# EAGLE board sensor_frontend_test_v0.5-default.266d5b95 (EAGLE 7.7.0), part 1 of 2
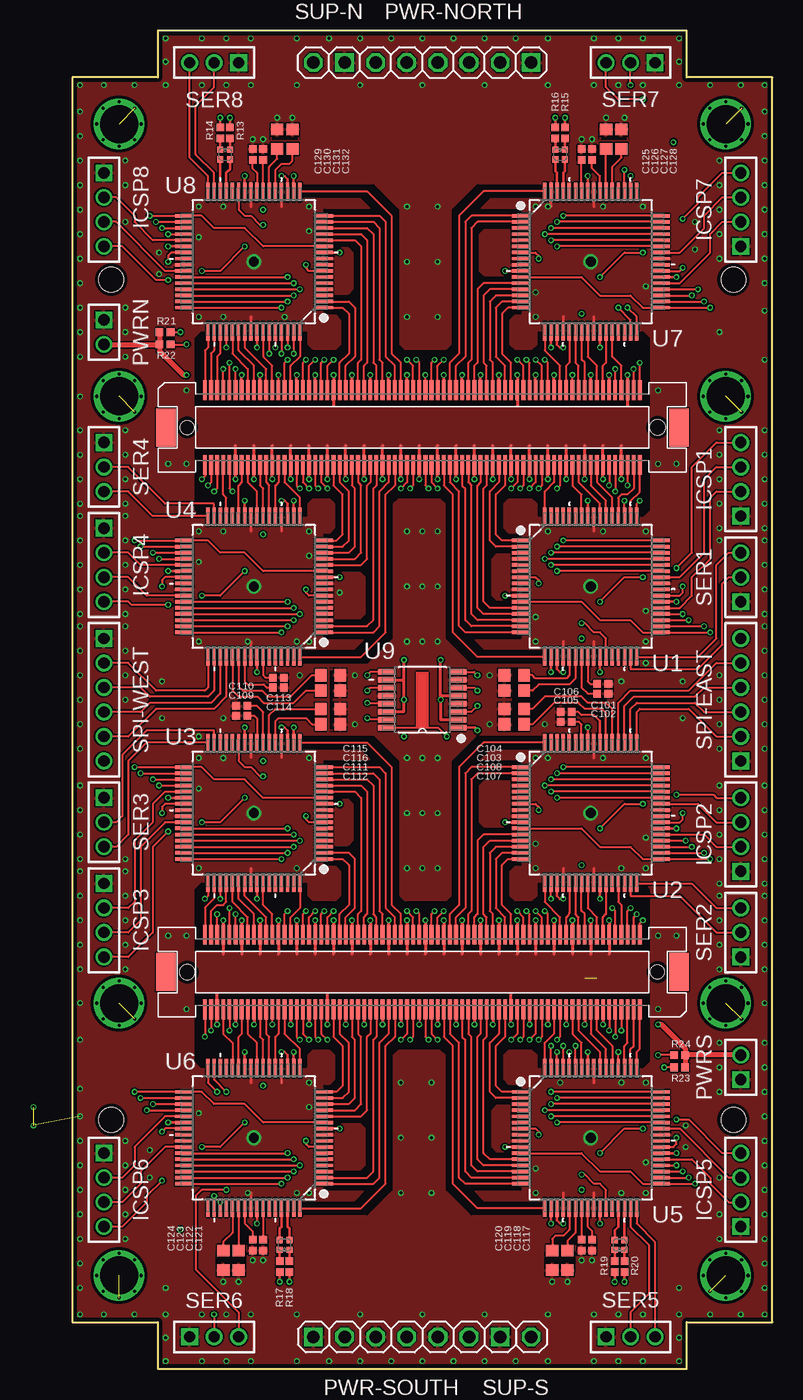
[diagram p0: board, top side]
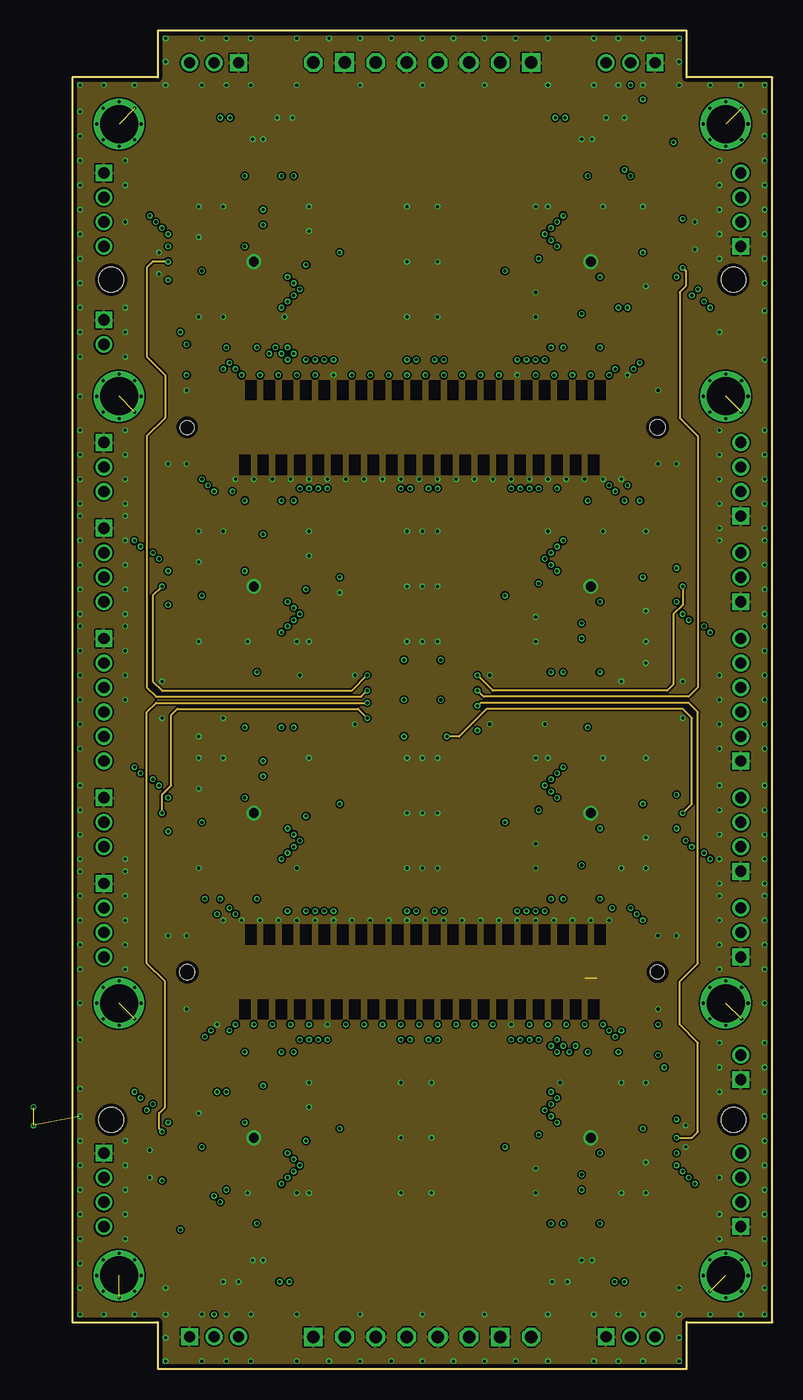
[diagram p1: board, inner layer Route2]
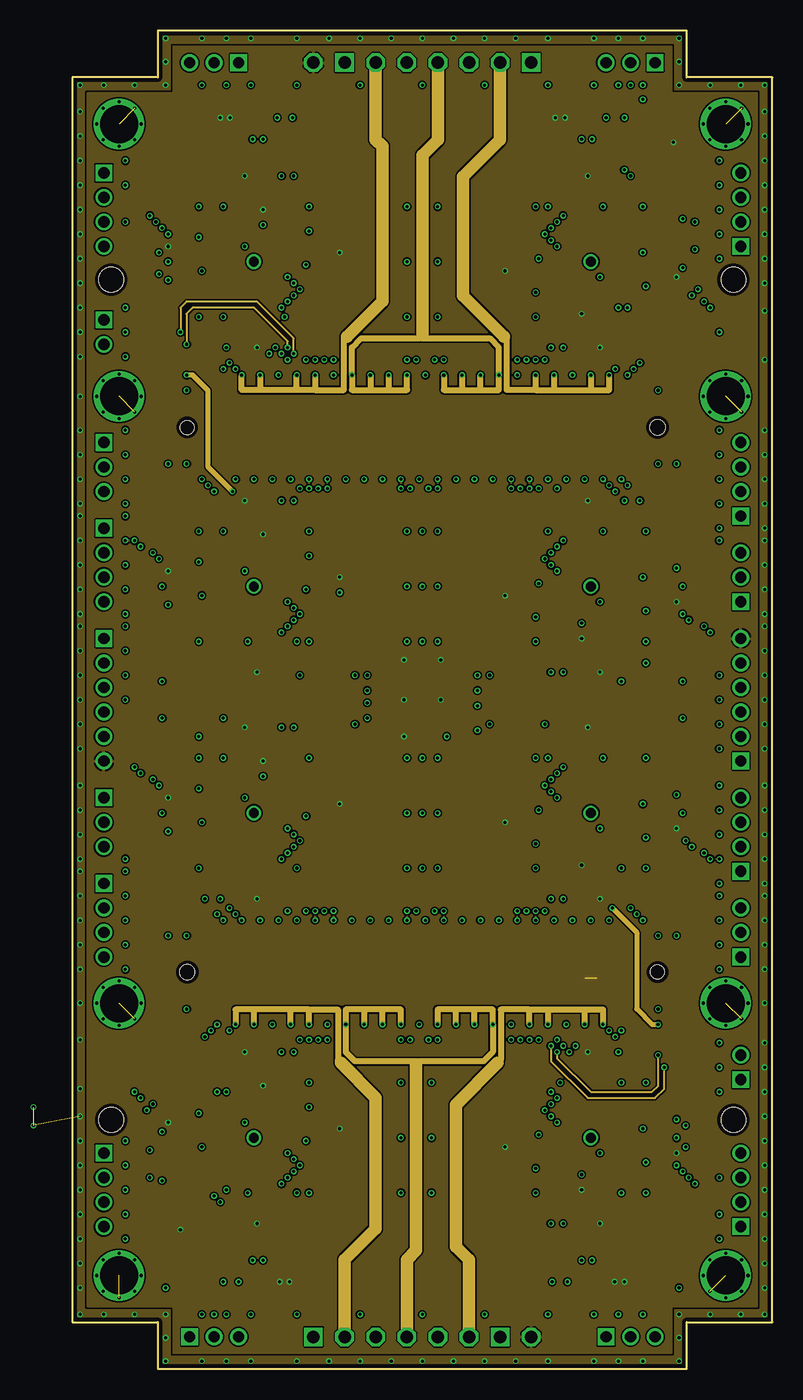
[diagram p2: board, inner layer Route15]
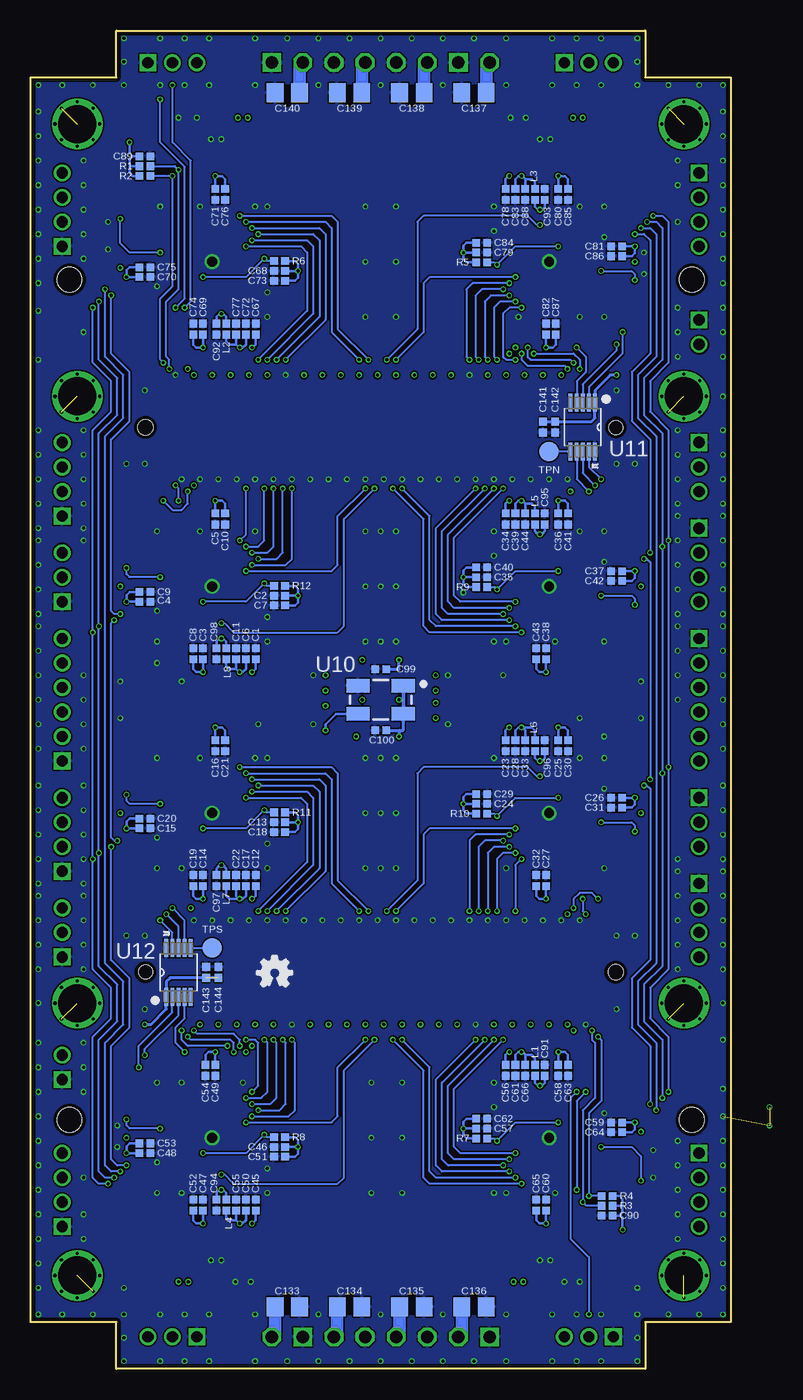
[diagram p3: board, bottom side, seen from below]

Size 57.15 x 109.22 mm. Coordinates in mm from the lower left corner, seen from the top.
Outline: 50.16,109.22 6.98,109.22 6.98,105.41 0,105.41 0,3.81 6.98,3.81 6.98,0 50.16,0 50.16,3.81 57.15,3.81 57.15,105.41 50.16,105.41 50.16,109.22
Copper layers (1*2*15*16): Top 0.035559375mm / dielectric 0.17018125mm / Route2 0.01778125mm / dielectric 47mil / Route15 0.01778125mm / dielectric 0.17018125mm / Bottom 0.035559375mm
Design rules "OSHPark-4layer-tuned *": minimum track width 5mil, minimum drill 10mil, track to track 5mil, track to pad 5mil, pad to pad 5mil, via to via 5mil, smd to smd 5mil, copper to edge 12mil, drill to drill 6mil, minimum pad ring 4mil, minimum via ring 4mil, stop-mask expansion 2mil, vias tented up to drill 40mil, thermal gap 6mil
Net classes: 0 default: width 0.152 mm, drill 0.254 mm; 1 power: width 0.203 mm, drill 0.254 mm; 2 analog: width 0.152 mm, drill 0.254 mm, clearance 0.305 mm
Holes 2 mm at 3.18,88.9 53.97,88.9 3.18,20.32 53.97,20.32
tRestrict: area 1.6,99.4 to 6,103.8; area 21,57.2 to 22,57.2; area 21,56 to 22,56; area 21,53.2 to 22,53.3; area 21,54.7 to 22,54.8; area 21,52.2 to 21.2,57; area 21,54.5 to 22,54.5; area 21,52 to 22,52; area 35.1,52 to 36.6,52; area 35.1,53.2 to 36.1,53.3; area 35.1,56 to 36.1,56; area 35.1,54.5 to 36.1,54.5; 50 more areas
bRestrict: area 19.8,92.3 to 20.8,92.3; area 19.8,91.5 to 20.8,91.5; area 19.8,89.9 to 20.8,89.9; area 8.8,92 to 9.8,92; area 8.8,91.2 to 9.8,91.2; area 8.8,90.4 to 9.8,90.4; area 15.5,84.4 to 15.5,85.4; area 14.7,84.4 to 14.7,85.4; area 13.8,84.4 to 13.9,85.4; area 14.5,95.4 to 14.5,96.4; area 13.7,95.4 to 13.7,96.4; area 12.8,95.4 to 12.9,96.4; 124 more areas

## Footprints (pad centres in the part's own frame; a part is rotated, then mirrored left to right if it is on the bottom)
0402-B = smd 0.62 x 0.62: 1 -0.45,0; 2 0.45,0
0603-B = smd 0.95 x 1: 1 -0.8,0; 2 0.8,0
0805-A = smd 1.35 x 1.55: 1 -1,0; 2 1,0
1X04M = drill 0.914 square: 1 -3,0 | drill 0.914: 2 -1,0; 3 1,0; 4 3,0
0404 = smd 0.5 x 0.5: 1 -0.4,-0.4; 2 0.4,-0.4; 3 0.4,0.4; 4 -0.4,0.4
1X06-S = drill 1.016 square: 1 -6.35,0 | drill 1.016 octagon: 2 -3.81,0; 3 -1.27,0; 4 1.27,0; 5 3.81,0; 6 6.35,0
1X02M = drill 0.914 square: 1 -1,0 | drill 0.914: 2 1,0
1X03M = drill 0.914 square: 1 -2,0 | drill 0.914: 2 0,0; 3 2,0
1X06M = drill 0.914 square: 1 -5,0 | drill 0.914: 2 -3,0; 3 -1,0; 4 1,0; 5 3,0; 6 5,0
1X02-S = drill 1.016 square: 1 -1.27,0 | drill 1.016 octagon: 2 1.27,0
TP16R = smd 1.6 x 1.6: TP 0,0
QFP50P1200X1200X120-64N = smd 1.5 x 0.28: 1 -5.7,3.75; 2 -5.7,3.25; 3 -5.7,2.75; 4 -5.7,2.25; 5 -5.7,1.75; 6 -5.7,1.25; 7 -5.7,0.75; 8 -5.7,0.25; 9 -5.7,-0.25; 10 -5.7,-0.75; 11 -5.7,-1.25; 12 -5.7,-1.75; 13 -5.7,-2.25; 14 -5.7,-2.75; 15 -5.7,-3.25; 16 -5.7,-3.75; 33 5.7,-3.75; 34 5.7,-3.25; 35 5.7,-2.75; 36 5.7,-2.25; 37 5.7,-1.75; 38 5.7,-1.25; 39 5.7,-0.75; 40 5.7,-0.25; 41 5.7,0.25; 42 5.7,0.75; 43 5.7,1.25; 44 5.7,1.75; 45 5.7,2.25; 46 5.7,2.75; 47 5.7,3.25; 48 5.7,3.75 | smd 0.28 x 1.5: 17 -3.75,-5.7; 18 -3.25,-5.7; 19 -2.75,-5.7; 20 -2.25,-5.7; 21 -1.75,-5.7; 22 -1.25,-5.7; 23 -0.75,-5.7; 24 -0.25,-5.7; 25 0.25,-5.7; 26 0.75,-5.7; 27 1.25,-5.7; 28 1.75,-5.7; 29 2.25,-5.7; 30 2.75,-5.7; 31 3.25,-5.7; 32 3.75,-5.7; 49 3.75,5.7; 50 3.25,5.7; 51 2.75,5.7; 52 2.25,5.7; 53 1.75,5.7; 54 1.25,5.7; 55 0.75,5.7; 56 0.25,5.7; 57 -0.25,5.7; 58 -0.75,5.7; 59 -1.25,5.7; 60 -1.75,5.7; 61 -2.25,5.7; 62 -2.75,5.7; 63 -3.25,5.7; 64 -3.75,5.7
SOP65P640X120-16N = smd 0.45 x 1.4: 1 -2.275,-2.9; 2 -1.625,-2.9; 3 -0.975,-2.9; 4 -0.325,-2.9; 5 0.325,-2.9; 6 0.975,-2.9; 7 1.625,-2.9; 8 2.275,-2.9; 9 2.275,2.9; 10 1.625,2.9; 11 0.975,2.9; 12 0.325,2.9; 13 -0.325,2.9; 14 -0.975,2.9; 15 -1.625,2.9; 16 -2.275,2.9
CRYSTAL-OSC-SMD-5X3 = smd 1.9 x 1.1: 1 -1.85,-1.15; 2 1.85,-1.15; 3 1.85,1.15; 4 -1.85,1.15
SOP50P490X110-10N = smd 1.5 x 0.32: 1 -2,1; 2 -2,0.5; 3 -2,0; 4 -2,-0.5; 5 -2,-1; 6 2,-1; 7 2,-0.5; 8 2,0; 9 2,0.5; 10 2,1
FX10A-144S = smd 0.3 x 1.6: 1 -17.75,3.05; 2 -17.75,-3.05; 3 -17.25,3.05; 4 -17.25,-3.05; 5 -16.75,3.05; 6 -16.75,-3.05; 7 -16.25,3.05; 8 -16.25,-3.05; 9 -15.75,3.05; 10 -15.75,-3.05; 11 -15.25,3.05; 12 -15.25,-3.05; 13 -14.75,3.05; 14 -14.75,-3.05; 15 -14.25,3.05; 16 -14.25,-3.05; 17 -13.75,3.05; 18 -13.75,-3.05; 19 -13.25,3.05; 20 -13.25,-3.05; 21 -12.75,3.05; 22 -12.75,-3.05; 23 -12.25,3.05; 24 -12.25,-3.05; 25 -11.75,3.05; 26 -11.75,-3.05; 27 -11.25,3.05; 28 -11.25,-3.05; 29 -10.75,3.05; 30 -10.75,-3.05; 31 -10.25,3.05; 32 -10.25,-3.05; 33 -9.75,3.05; 34 -9.75,-3.05; 35 -9.25,3.05; 36 -9.25,-3.05; 37 -8.75,3.05; 38 -8.75,-3.05; 39 -8.25,3.05; 40 -8.25,-3.05; 41 -7.75,3.05; 42 -7.75,-3.05; 43 -7.25,3.05; 44 -7.25,-3.05; 45 -6.75,3.05; 46 -6.75,-3.05; 47 -6.25,3.05; 48 -6.25,-3.05; 49 -5.75,3.05; 50 -5.75,-3.05; 51 -5.25,3.05; 52 -5.25,-3.05; 53 -4.75,3.05; 54 -4.75,-3.05; 55 -4.25,3.05; 56 -4.25,-3.05; 57 -3.75,3.05; 58 -3.75,-3.05; 59 -3.25,3.05; 60 -3.25,-3.05; 61 -2.75,3.05; 62 -2.75,-3.05; 63 -2.25,3.05; 64 -2.25,-3.05; 65 -1.75,3.05; 66 -1.75,-3.05; 67 -1.25,3.05; 68 -1.25,-3.05; 69 -0.75,3.05; 70 -0.75,-3.05; 71 -0.25,3.05; 72 -0.25,-3.05; 73 0.25,3.05; 74 0.25,-3.05; 75 0.75,3.05; 76 0.75,-3.05; 77 1.25,3.05; 78 1.25,-3.05; 79 1.75,3.05; 80 1.75,-3.05; 81 2.25,3.05; 82 2.25,-3.05; 83 2.75,3.05; 84 2.75,-3.05; 85 3.25,3.05; 86 3.25,-3.05; 87 3.75,3.05; 88 3.75,-3.05; 89 4.25,3.05; 90 4.25,-3.05; 91 4.75,3.05; 92 4.75,-3.05; 93 5.25,3.05; 94 5.25,-3.05; 95 5.75,3.05; 96 5.75,-3.05; 97 6.25,3.05; 98 6.25,-3.05; 99 6.75,3.05; 100 6.75,-3.05; 101 7.25,3.05; 102 7.25,-3.05; 103 7.75,3.05; 104 7.75,-3.05; 105 8.25,3.05; 106 8.25,-3.05; 107 8.75,3.05; 108 8.75,-3.05; 109 9.25,3.05; 110 9.25,-3.05; 111 9.75,3.05; 112 9.75,-3.05; 113 10.25,3.05; 114 10.25,-3.05; 115 10.75,3.05; 116 10.75,-3.05; 117 11.25,3.05; 118 11.25,-3.05; 119 11.75,3.05; 120 11.75,-3.05; 121 12.25,3.05; 122 12.25,-3.05; 123 12.75,3.05; 124 12.75,-3.05; 125 13.25,3.05; 126 13.25,-3.05; 127 13.75,3.05; 128 13.75,-3.05; 129 14.25,3.05; 130 14.25,-3.05; 131 14.75,3.05; 132 14.75,-3.05; 133 15.25,3.05; 134 15.25,-3.05; 135 15.75,3.05; 136 15.75,-3.05; 137 16.25,3.05; 138 16.25,-3.05; 139 16.75,3.05; 140 16.75,-3.05; 141 17.25,3.05; 142 17.25,-3.05; 143 17.75,3.05; 144 17.75,-3.05 | smd 1.6 x 3.1: M1 -20.95,0; M2 20.95,0 | hole 1.125: -19.2,0 | hole 1.225: 19.2,0

## Placement (x,y rotation side)
C1  [0402-B]  38.77,58.36 90 bottom
C2  [0402-B]  36.83,63.11 180 bottom
C3  [0402-B]  43.08,58.36 90 bottom
C4  [0402-B]  47.83,62.61 0 bottom
C5  [0402-B]  42.08,69.36 270 bottom
C6  [0402-B]  39.58,58.36 90 bottom
C7  [0402-B]  36.83,62.31 180 bottom
C8  [0402-B]  43.88,58.36 90 bottom
C9  [0402-B]  47.83,63.41 0 bottom
C10  [0402-B]  41.27,69.36 270 bottom
C11  [0402-B]  40.38,58.36 90 bottom
C12  [0402-B]  38.77,39.86 90 bottom
C13  [0402-B]  36.83,44.61 180 bottom
C14  [0402-B]  43.08,39.86 90 bottom
C15  [0402-B]  47.83,44.11 0 bottom
C16  [0402-B]  42.08,50.86 270 bottom
C17  [0402-B]  39.58,39.86 90 bottom
C18  [0402-B]  36.83,43.81 180 bottom
C19  [0402-B]  43.88,39.86 90 bottom
C20  [0402-B]  47.83,44.91 0 bottom
C21  [0402-B]  41.27,50.86 270 bottom
C22  [0402-B]  40.38,39.86 90 bottom
C23  [0402-B]  18.38,50.86 270 bottom
C24  [0402-B]  20.32,46.11 0 bottom
C25  [0402-B]  14.07,50.86 270 bottom
C26  [0402-B]  9.32,46.61 180 bottom
C27  [0402-B]  15.07,39.86 90 bottom
C28  [0402-B]  17.57,50.86 270 bottom
C29  [0402-B]  20.32,46.91 0 bottom
C30  [0402-B]  13.27,50.86 270 bottom
C31  [0402-B]  9.32,45.81 180 bottom
C32  [0402-B]  15.88,39.86 90 bottom
C33  [0402-B]  16.77,50.86 270 bottom
C34  [0402-B]  18.38,69.36 270 bottom
C35  [0402-B]  20.32,64.61 0 bottom
C36  [0402-B]  14.07,69.36 270 bottom
C37  [0402-B]  9.32,65.11 180 bottom
C38  [0402-B]  15.07,58.36 90 bottom
C39  [0402-B]  17.57,69.36 270 bottom
C40  [0402-B]  20.32,65.41 0 bottom
C41  [0402-B]  13.27,69.36 270 bottom
C42  [0402-B]  9.32,64.31 180 bottom
C43  [0402-B]  15.88,58.36 90 bottom
C44  [0402-B]  16.77,69.36 270 bottom
C45  [0402-B]  38.77,13.36 90 bottom
C46  [0402-B]  36.83,18.11 180 bottom
C47  [0402-B]  43.08,13.36 90 bottom
C48  [0402-B]  47.83,17.61 0 bottom
C49  [0402-B]  42.08,24.36 270 bottom
C50  [0402-B]  39.58,13.36 90 bottom
C51  [0402-B]  36.83,17.31 180 bottom
C52  [0402-B]  43.88,13.36 90 bottom
C53  [0402-B]  47.83,18.41 0 bottom
C54  [0402-B]  42.88,24.36 270 bottom
C55  [0402-B]  40.38,13.36 90 bottom
C56  [0402-B]  18.38,24.36 270 bottom
C57  [0402-B]  20.32,19.61 0 bottom
C58  [0402-B]  14.07,24.36 270 bottom
C59  [0402-B]  9.32,20.11 180 bottom
C60  [0402-B]  15.07,13.36 90 bottom
C61  [0402-B]  17.57,24.36 270 bottom
C62  [0402-B]  20.32,20.41 0 bottom
C63  [0402-B]  13.27,24.36 270 bottom
C64  [0402-B]  9.32,19.31 180 bottom
C65  [0402-B]  15.88,13.36 90 bottom
C66  [0402-B]  16.77,24.36 270 bottom
C67  [0402-B]  38.77,84.86 90 bottom
C68  [0402-B]  36.83,89.61 180 bottom
C69  [0402-B]  43.08,84.86 90 bottom
C70  [0402-B]  47.83,89.11 0 bottom
C71  [0402-B]  42.08,95.86 270 bottom
C72  [0402-B]  39.58,84.86 90 bottom
C73  [0402-B]  36.83,88.81 180 bottom
C74  [0402-B]  43.88,84.86 90 bottom
C75  [0402-B]  47.83,89.91 0 bottom
C76  [0402-B]  41.27,95.86 270 bottom
C77  [0402-B]  40.38,84.86 90 bottom
C78  [0402-B]  18.38,95.86 270 bottom
C79  [0402-B]  20.32,91.11 0 bottom
C80  [0402-B]  14.07,95.86 270 bottom
C81  [0402-B]  9.32,91.61 180 bottom
C82  [0402-B]  15.07,84.86 90 bottom
C83  [0402-B]  17.57,95.86 270 bottom
C84  [0402-B]  20.32,91.91 0 bottom
C85  [0402-B]  13.27,95.86 270 bottom
C86  [0402-B]  9.32,90.81 180 bottom
C87  [0402-B]  14.27,84.86 90 bottom
C88  [0402-B]  16.77,95.86 270 bottom
C89  [0402-B]  47.83,98.96 0 bottom
C90  [0402-B]  10.07,12.51 180 bottom
C91  [0402-B]  15.17,24.36 90 bottom
C92  [0402-B]  41.98,84.86 270 bottom
C93  [0402-B]  15.17,95.86 90 bottom
C94  [0402-B]  41.98,13.36 270 bottom
C95  [0402-B]  15.17,69.36 90 bottom
C96  [0402-B]  15.17,50.86 90 bottom
C97  [0402-B]  41.98,39.86 270 bottom
C98  [0402-B]  41.98,58.36 270 bottom
C99  [0402-B]  28.57,57.11 180 bottom
C100  [0402-B]  28.57,52.11 180 bottom
C101  [0402-B]  43.31,55.91 0 top
C102  [0402-B]  43.31,55.11 0 top
C103  [0603-B]  36.08,55.36 180 top
C104  [0603-B]  36.08,56.61 180 top
C105  [0402-B]  40.33,52.81 180 top
C106  [0402-B]  40.33,53.61 180 top
C107  [0603-B]  36.08,52.61 180 top
C108  [0603-B]  36.08,53.86 180 top
C109  [0402-B]  13.82,53.31 180 top
C110  [0402-B]  13.82,54.11 180 top
C111  [0603-B]  21.07,53.86 0 top
C112  [0603-B]  21.07,52.61 0 top
C113  [0402-B]  16.82,56.41 0 top
C114  [0402-B]  16.82,55.61 0 top
C115  [0603-B]  21.07,56.61 0 top
C116  [0603-B]  21.07,55.36 0 top
C117  [0402-B]  42.42,10.11 270 top
C118  [0402-B]  41.58,10.11 270 top
C119  [0603-B]  40.42,8.86 270 top
C120  [0603-B]  39.17,8.86 270 top
C121  [0402-B]  15.57,10.11 270 top
C122  [0402-B]  14.72,10.11 270 top
C123  [0603-B]  13.57,8.86 270 top
C124  [0603-B]  12.32,8.86 270 top
C125  [0402-B]  41.58,99.11 90 top
C126  [0402-B]  42.42,99.11 90 top
C127  [0603-B]  43.58,100.36 90 top
C128  [0603-B]  44.83,100.36 90 top
C129  [0402-B]  14.72,99.11 90 top
C130  [0402-B]  15.57,99.11 90 top
C131  [0603-B]  16.73,100.36 90 top
C132  [0603-B]  17.98,100.36 90 top
C133  [0805-A]  36.2,5.08 0 bottom
C134  [0805-A]  31.11,5.08 0 bottom
C135  [0805-A]  26.04,5.08 0 bottom
C136  [0805-A]  20.95,5.08 0 bottom
C137  [0805-A]  20.95,104.14 180 bottom
C138  [0805-A]  26.04,104.14 180 bottom
C139  [0805-A]  31.11,104.14 180 bottom
C140  [0805-A]  36.2,104.14 180 bottom
C141  [0402-B]  15.32,76.86 270 bottom
C142  [0402-B]  14.32,76.86 270 bottom
C143  [0402-B]  42.83,32.36 90 bottom
C144  [0402-B]  41.83,32.36 90 bottom
ICSP1  [1X04M]  54.58,72.61 90 top
ICSP2  [1X04M]  54.58,43.61 90 top
ICSP3  [1X04M]  2.57,36.61 270 top
ICSP4  [1X04M]  2.57,65.61 270 top
ICSP5  [1X04M]  54.58,14.61 90 top
ICSP6  [1X04M]  2.57,14.61 270 top
ICSP7  [1X04M]  54.58,94.61 90 top
ICSP8  [1X04M]  2.57,94.61 270 top
L1  [0402-B]  15.97,24.36 90 bottom
L2  [0402-B]  41.17,84.86 270 bottom
L3  [0402-B]  15.97,95.86 90 bottom
L4  [0402-B]  41.17,13.36 270 bottom
L5  [0402-B]  15.97,69.36 90 bottom
L6  [0402-B]  15.97,50.86 90 bottom
L7  [0402-B]  41.17,39.86 270 bottom
L8  [0402-B]  41.17,58.36 270 bottom
LED1  DUAL-LED-0404  [0404]  12.47,99.11 180 top
LED2  DUAL-LED-0404  [0404]  39.83,99.11 180 top
LED3  DUAL-LED-0404  [0404]  17.32,10.11 0 top
LED4  DUAL-LED-0404  [0404]  44.67,10.11 0 top
LOGO1  OSHW_LOGO_FILLX0100-NT  [OSHW_FILLX100_NOTEXT]  38.64,31.19 0 bottom
PWR-NORTH  [1X06-S]  31.11,106.61 180 top
PWR-SOUTH  [1X06-S]  26.04,2.61 0 top
PWRN  [1X02M]  2.57,84.61 270 top
PWRS  [1X02M]  54.58,24.61 90 top
R1  [0402-B]  47.83,98.16 0 bottom
R2  [0402-B]  47.83,97.36 0 bottom
R3  [0402-B]  10.07,13.31 180 bottom
R4  [0402-B]  10.07,14.11 180 bottom
R5  [0402-B]  20.32,90.31 0 bottom
R6  [0402-B]  36.83,90.41 180 bottom
R7  [0402-B]  20.32,18.81 0 bottom
R8  [0402-B]  36.83,18.91 180 bottom
R9  [0402-B]  20.32,63.81 0 bottom
R10  [0402-B]  20.32,45.31 0 bottom
R11  [0402-B]  36.83,45.41 180 bottom
R12  [0402-B]  36.83,63.91 180 bottom
R13  [0402-B]  12.88,100.86 270 top
R14  [0402-B]  12.07,100.86 270 top
R15  [0402-B]  40.23,100.86 270 top
R16  [0402-B]  39.42,100.86 270 top
R17  [0402-B]  16.92,8.36 90 top
R18  [0402-B]  17.73,8.36 90 top
R19  [0402-B]  44.27,8.36 90 top
R20  [0402-B]  45.08,8.36 90 top
R21  [0402-B]  7.57,84.61 0 top
R22  [0402-B]  7.57,83.61 0 top
R23  [0402-B]  49.58,24.61 180 top
R24  [0402-B]  49.58,25.61 180 top
SER1  [1X03M]  54.58,64.61 90 top
SER2  [1X03M]  54.58,35.61 90 top
SER3  [1X03M]  2.57,44.61 270 top
SER4  [1X03M]  2.57,73.61 270 top
SER5  [1X03M]  45.58,2.61 0 top
SER6  [1X03M]  11.57,2.61 0 top
SER7  [1X03M]  45.58,106.61 180 top
SER8  [1X03M]  11.57,106.61 180 top
SPI-EAST  [1X06M]  54.58,54.61 90 top
SPI-WEST  [1X06M]  2.57,54.61 270 top
SUP-N  [1X02-S]  20.95,106.61 180 top
SUP-S  [1X02-S]  36.2,2.61 0 top
TPN  TPTP16R  [TP16R]  14.82,74.86 0 bottom
TPS  TPTP16R  [TP16R]  42.33,34.36 0 bottom
U1  PIC16F1526-I/PT  [QFP50P1200X1200X120-64N]  42.33,63.86 0 top
U2  PIC16F1526-I/PT  [QFP50P1200X1200X120-64N]  42.33,45.36 0 top
U3  PIC16F1526-I/PT  [QFP50P1200X1200X120-64N]  14.82,45.36 180 top
U4  PIC16F1526-I/PT  [QFP50P1200X1200X120-64N]  14.82,63.86 180 top
U5  PIC16F1526-I/PT  [QFP50P1200X1200X120-64N]  42.33,18.86 0 top
U6  PIC16F1526-I/PT  [QFP50P1200X1200X120-64N]  14.82,18.86 180 top
U7  PIC16F1526-I/PT  [QFP50P1200X1200X120-64N]  42.33,90.36 0 top
U8  PIC16F1526-I/PT  [QFP50P1200X1200X120-64N]  14.82,90.36 180 top
U9  SI53365  [SOP65P640X120-16N]  28.57,54.61 90 top
U10  OSCILLATOR5X3-PIN1-INDICATED  [CRYSTAL-OSC-SMD-5X3]  28.57,54.61 180 bottom
U11  MCP4728-E/UN  [SOP50P490X110-10N]  12.07,76.86 270 bottom
U12  MCP4728-E/UN  [SOP50P490X110-10N]  45.08,32.36 90 bottom
U$2  APERTUS_LOGO334X100  [APERTUS_LOGO_334X100]  36.65,98.83 0 bottom
U$3  AXIOM_LOGO525X80  [AXIOM_LOGO_525X80]  34.13,96.63 0 bottom
X-NORTH  FX10-144S  [FX10A-144S]  28.57,76.84 0 top
X-SOUTH  FX10-144S  [FX10A-144S]  28.57,32.38 180 top

## Library data of the parts
C1-C144 L1-L8 R1-R24 = generic-rcl
ICSP1-ICSP8 PWR-NORTH PWR-SOUTH PWRN PWRS SER1-SER8 SPI-EAST SPI-WEST SUP-N SUP-S = pinhead-2
LED1-LED4 = led
LOGO1 = ohw-logo
TPN TPS = testpad
U1-U8 = pic16f1526; MPN: PIC16F1526-I/PT; OC_FARNELL: 1909408; OC_NEWARK: 13T4720; PACKAGE: TQFP-64; SUPPLIER: Microchip
U9 = si53365
U10 = SparkFun-FreqCtrl
U11 U12 = mcp4728; MPN: MCP4728-E/UN; OC_FARNELL: 1800217; OC_NEWARK: 08R1808; PACKAGE: MSOP-10; SUPPLIER: MICROCHIP
U$2 U$3 = logos_apertus_axiom
X-NORTH X-SOUTH = fx10

## Nets
!E_SS: U1.11 U1.33 U2.11 U2.33 U5.11 U5.33 U7.11 U7.33
!LDAC_N: U8.52 U11.4
!LDAC_S: U5.52 U12.4
!MCLR1!: ICSP1.4 R12.2 U1.7
!MCLR2!: ICSP2.4 R11.2 U2.7
!MCLR3!: ICSP3.4 R10.2 U3.7
!MCLR4!: ICSP4.4 R9.2 U4.7
!MCLR5!: ICSP5.4 R8.2 U5.7
!MCLR6!: ICSP6.4 R7.2 U6.7
!MCLR7!: ICSP7.4 R6.2 U7.7
!MCLR8!: ICSP8.4 R5.2 U8.7
!W_SS: U3.11 U3.33 U4.11 U4.33 U6.11 U6.33 U8.11 U8.33
AVCC1 [power]: C6.1 C11.1 L8.2 U1.19
AVCC2 [power]: C17.1 C22.1 L7.2 U2.19
AVCC3 [power]: C28.1 C33.1 L6.2 U3.19
AVCC4 [power]: C39.1 C44.1 L5.2 U4.19
AVCC5 [power]: C50.1 C55.1 L4.2 U5.19
AVCC6 [power]: C61.1 C66.1 L1.2 U6.19
AVCC7 [power]: C72.1 C77.1 L2.2 U7.19
AVCC8 [power]: C83.1 C88.1 L3.2 U8.19
CAP1A [analog]: C101.1 U1.24
CAP1B [analog]: C102.1 U1.23
CAP1C [analog]: C103.1 U1.22
CAP1D [analog]: C104.1 U1.21
CAP2A [analog]: C105.1 U2.58
CAP2B [analog]: C106.1 U2.55
CAP2C [analog]: C107.1 U2.54
CAP2D [analog]: C108.1 U2.53
CAP3A [analog]: C109.1 U3.24
CAP3B [analog]: C110.1 U3.23
CAP3C [analog]: C111.1 U3.22
CAP3D [analog]: C112.1 U3.21
CAP4A [analog]: C113.1 U4.58
CAP4B [analog]: C114.1 U4.55
CAP4C [analog]: C115.1 U4.54
CAP4D [analog]: C116.1 U4.53
CAP5A [analog]: C117.1 U5.24
CAP5B [analog]: C118.1 U5.23
CAP5C [analog]: C119.1 U5.22
CAP5D [analog]: C120.1 U5.21
CAP6A [analog]: C121.1 U6.58
CAP6B [analog]: C122.1 U6.55
CAP6C [analog]: C123.1 U6.54
CAP6D [analog]: C124.1 U6.53
CAP7A [analog]: C125.1 U7.58
CAP7B [analog]: C126.1 U7.55
CAP7C [analog]: C127.1 U7.54
CAP7D [analog]: C128.1 U7.53
CAP8A [analog]: C129.1 U8.24
CAP8B [analog]: C130.1 U8.23
CAP8C [analog]: C131.1 U8.22
CAP8D [analog]: C132.1 U8.21
CLKIN1: U1.39 U9.8
CLKIN2: U2.39 U9.16
CLKIN3: U3.39 U9.15
CLKIN4: U4.39 U9.9
CLKIN5: U5.39 U9.3
CLKIN6: U6.39 U9.13
CLKIN7: U7.39 U9.6
CLKIN8: U8.39 U9.11
E_SCK: U1.34 U2.34 U5.34 U7.34
E_SD_17: U1.36 U7.35
E_SD_21: U1.35 U2.36
E_SD_52: U2.35 U5.36
E_SD_75: U5.35 U7.36
GND [power]: C1.2 C2.2 C3.2 C4.2 C5.2 C6.2 C7.2 C8.2 C9.2 C10.2 C11.2 C12.2 C13.2 C14.2 C15.2 C16.2 C17.2 C18.2 C19.2 C20.2 C21.2 C22.2 C23.2 C24.2 C25.2 C26.2 C27.2 C28.2 C29.2 C30.2 C31.2 C32.2 C33.2 C34.2 C35.2 C36.2 C37.2 C38.2 C39.2 C40.2 C41.2 C42.2 C43.2 C44.2 C45.2 C46.2 C47.2 C48.2 C49.2 C50.2 C51.2 C52.2 C53.2 C54.2 C55.2 C56.2 C57.2 C58.2 C59.2 C60.2 C61.2 C62.2 C63.2 C64.2 C65.2 C66.2 C67.2 C68.2 C69.2 C70.2 C71.2 C72.2 C73.2 C74.2 C75.2 C76.2 C77.2 C78.2 C79.2 C80.2 C81.2 C82.2 C83.2 C84.2 C85.2 C86.2 C87.2 C88.2 C89.2 C90.2 C91.2 C92.2 C93.2 C94.2 C95.2 C96.2 C97.2 C98.2 C99.2 C100.2 C101.2 C102.2 C103.2 C104.2 C105.2 C106.2 C107.2 C108.2 C109.2 C110.2 C111.2 C112.2 C113.2 C114.2 C115.2 C116.2 C117.2 C118.2 C119.2 C120.2 C121.2 C122.2 C123.2 C124.2 C125.2 C126.2 C127.2 C128.2 C129.2 C130.2 C131.2 C132.2 C133.2 C134.2 C135.2 C136.2 C137.2 C138.2 C139.2 C140.2 C141.2 C142.2 C143.2 C144.2 ICSP1.1 ICSP2.1 ICSP3.1 ICSP4.1 ICSP5.1 ICSP6.1 ICSP7.1 ICSP8.1 PWR-NORTH.1 PWR-NORTH.3 PWR-NORTH.5 PWR-SOUTH.1 PWR-SOUTH.3 PWR-SOUTH.5 PWRN.1 PWRS.1 SER1.1 SER2.1 SER3.1 SER4.1 SER5.1 SER6.1 SER7.1 SER8.1 SPI-EAST.1 SPI-WEST.1 SUP-N.1 SUP-S.1 U1.9 U1.20 U1.25 U1.41 U1.56 U2.9 U2.20 U2.25 U2.41 U2.56 U3.9 U3.20 U3.25 U3.41 U3.56 U4.9 U4.20 U4.25 U4.41 U4.56 U5.9 U5.20 U5.25 U5.41 U5.56 U6.9 U6.20 U6.25 U6.41 U6.56 U7.9 U7.20 U7.25 U7.41 U7.56 U7.63 U8.9 U8.20 U8.25 U8.41 U8.56 U9.4 U9.7 U9.12 U10.2 U11.10 U12.10 X-NORTH.12 X-NORTH.18 X-NORTH.24 X-NORTH.30 X-NORTH.36 X-NORTH.42 X-NORTH.43 X-NORTH.48 X-NORTH.54 X-NORTH.60 X-NORTH.66 X-NORTH.72 X-NORTH.78 X-NORTH.84 X-NORTH.90 X-NORTH.96 X-NORTH.102 X-NORTH.103 X-NORTH.108 X-NORTH.114 X-NORTH.120 X-NORTH.126 X-NORTH.132 X-NORTH.138 X-NORTH.139 X-SOUTH.12 X-SOUTH.18 X-SOUTH.24 X-SOUTH.30 X-SOUTH.36 X-SOUTH.42 X-SOUTH.43 X-SOUTH.48 X-SOUTH.54 X-SOUTH.60 X-SOUTH.66 X-SOUTH.72 X-SOUTH.78 X-SOUTH.84 X-SOUTH.90 X-SOUTH.96 X-SOUTH.102 X-SOUTH.103 X-SOUTH.108 X-SOUTH.114 X-SOUTH.120 X-SOUTH.126 X-SOUTH.132 X-SOUTH.138 X-SOUTH.139
ICSPCLK1: ICSP1.3 U1.42
ICSPCLK2: ICSP2.3 U2.42
ICSPCLK3: ICSP3.3 U3.42
ICSPCLK4: ICSP4.3 U4.42
ICSPCLK5: ICSP5.3 U5.42
ICSPCLK6: ICSP6.3 U6.42
ICSPCLK7: ICSP7.3 U7.42
ICSPCLK8: ICSP8.3 U8.42
ICSPDAT1: ICSP1.2 U1.37
ICSPDAT2: ICSP2.2 U2.37
ICSPDAT3: ICSP3.2 U3.37
ICSPDAT4: ICSP4.2 U4.37
ICSPDAT5: ICSP5.2 U5.37
ICSPDAT6: ICSP6.2 U6.37
ICSPDAT7: ICSP7.2 U7.37
ICSPDAT8: ICSP8.2 U8.37
LED5: LED4.4 U5.29
LED5B: LED4.3 U5.30
LED6: LED3.4 U6.61
LED6B: LED3.3 U6.62
LED7: LED2.4 U7.61
LED7B: LED2.3 U7.62
LED8: LED1.4 U8.29
LED8B: LED1.3 U8.30
N00_N [analog]: U4.24 X-NORTH.16
N00_P [analog]: U4.27 X-NORTH.14
N01_N [analog]: U8.54 X-NORTH.17
N01_P [analog]: U8.53 X-NORTH.15
N02_N [analog]: U4.22 X-NORTH.22
N02_P [analog]: U4.23 X-NORTH.20
N03_N [analog]: U8.58 X-NORTH.23
N03_P [analog]: U8.55 X-NORTH.21
N04_N [analog]: U4.17 X-NORTH.28
N04_P [analog]: U4.21 X-NORTH.26
N05_N [analog]: U8.64 X-NORTH.29
N05_P [analog]: U8.48 X-NORTH.27
N06_N [analog]: U4.44 X-NORTH.34
N06_P [analog]: U4.43 X-NORTH.32
N07_N [analog]: U8.46 X-NORTH.35
N07_P [analog]: U8.47 X-NORTH.33
N08_N [analog]: U4.46 X-NORTH.40
N08_P [analog]: U4.45 X-NORTH.38
N09_N [analog]: U8.44 X-NORTH.41
N09_P [analog]: U8.45 X-NORTH.39
N10_N [analog]: U4.15 X-NORTH.46
N10_P [analog]: U4.16 X-NORTH.44
N11_N [analog]: U8.2 X-NORTH.47
N11_P [analog]: U8.1 X-NORTH.45
N12_N [analog]: U4.13 X-NORTH.52
N12_P [analog]: U4.14 X-NORTH.50
N13_N [analog]: U8.13 X-NORTH.53
N13_P [analog]: U8.12 X-NORTH.51
N14_N [analog]: U4.2 X-NORTH.58
N14_P [analog]: U4.12 X-NORTH.56
N15_N [analog]: U8.15 X-NORTH.59
N15_P [analog]: U8.14 X-NORTH.57
N16_N [analog]: U4.64 X-NORTH.64
N16_P [analog]: U4.1 X-NORTH.62
N17_N [analog]: U8.17 X-NORTH.65
N17_P [analog]: U8.16 X-NORTH.63
N18_N [analog]: U4.48 X-NORTH.70
N18_P [analog]: U4.47 X-NORTH.68
N19_N [analog]: U8.27 X-NORTH.71
N19_P [analog]: U8.43 X-NORTH.69
N20_N [analog]: U1.43 X-NORTH.76
N20_P [analog]: U1.27 X-NORTH.74
N21_N [analog]: U7.47 X-NORTH.77
N21_P [analog]: U7.48 X-NORTH.75
N22_N [analog]: U1.16 X-NORTH.82
N22_P [analog]: U1.17 X-NORTH.80
N23_N [analog]: U7.1 X-NORTH.83
N23_P [analog]: U7.64 X-NORTH.81
N24_N [analog]: U1.14 X-NORTH.88
N24_P [analog]: U1.15 X-NORTH.86
N25_N [analog]: U7.12 X-NORTH.89
N25_P [analog]: U7.2 X-NORTH.87
N26_N [analog]: U1.12 X-NORTH.94
N26_P [analog]: U1.13 X-NORTH.92
N27_N [analog]: U7.14 X-NORTH.95
N27_P [analog]: U7.13 X-NORTH.93
N28_N [analog]: U1.1 X-NORTH.100
N28_P [analog]: U1.2 X-NORTH.98
N29_N [analog]: U7.16 X-NORTH.101
N29_P [analog]: U7.15 X-NORTH.99
N30_N [analog]: U1.45 X-NORTH.106
N30_P [analog]: U1.44 X-NORTH.104
N31_N [analog]: U7.45 X-NORTH.107
N31_P [analog]: U7.46 X-NORTH.105
N32_N [analog]: U1.47 X-NORTH.112
N32_P [analog]: U1.46 X-NORTH.110
N33_N [analog]: U7.43 X-NORTH.113
N33_P [analog]: U7.44 X-NORTH.111
N34_N [analog]: U1.48 X-NORTH.118
N34_P [analog]: U1.64 X-NORTH.116
N35_N [analog]: U7.21 X-NORTH.119
N35_P [analog]: U7.17 X-NORTH.117
N36_N [analog]: U1.55 X-NORTH.124
N36_P [analog]: U1.58 X-NORTH.122
N37_N [analog]: U7.23 X-NORTH.125
N37_P [analog]: U7.22 X-NORTH.123
N38_N [analog]: U1.53 X-NORTH.130
N38_P [analog]: U1.54 X-NORTH.128
N39_N [analog]: U7.27 X-NORTH.131
N39_P [analog]: U7.24 X-NORTH.129
N$2: C45.1 U5.18
N$3: U1.60
N$5: U1.61
N$6: U1.59
N$7: U9.1 U10.3
N$8: U1.40
N$9: U2.40
N$13: TPS.TP U12.6
N$15: C1.1 U1.18
N$16: LED1.1 R13.2
N$18: U3.40
N$19: LED1.2 R14.2
N$20: LED2.1 R15.2
N$21: LED2.2 R16.2
N$22: LED3.1 R17.2
N$23: LED3.2 R18.2
N$24: LED4.1 R19.2
N$25: LED4.2 R20.2
N$27: U4.40
N$28: U5.40
N$29: U6.40
N$30: U7.40
N$31: U8.40
N$33: TPN.TP U11.6
N$44: U5.28
N$49: C56.1 U6.18
N$64: U1.28
N$69: C12.1 U2.18
N$91: U2.28
N$96: C23.1 U3.18
N$118: U3.28
N$123: C34.1 U4.18
N$145: U4.28
N$169: C67.1 U7.18
N$196: C78.1 U8.18
N_CHK_EN: U4.29 X-NORTH.8
N_CHK_V: C141.1 C142.1 PWRN.2 R21.1 R22.1 U11.1 X-NORTH.10
N_I2C_EN: U7.28 X-NORTH.137
N_I2C_V: X-NORTH.135
N_SCK: U1.50 X-NORTH.144
N_SCL: R2.2 U7.50 X-NORTH.143
N_SDA: R1.2 U7.51 X-NORTH.141
N_SDI: U1.51 X-NORTH.140
N_SDO: U1.52 X-NORTH.142
N_SPI_EN: U1.49 X-NORTH.136
N_SPI_V: X-NORTH.134
N_VE [power]: C140.1 PWR-NORTH.2 X-NORTH.109 X-NORTH.115 X-NORTH.127 X-NORTH.133
N_VE_CV: U11.7 X-NORTH.6
N_VE_OV: U8.51 X-NORTH.5
N_VE_RS: X-NORTH.121
N_VE_UV: U8.61 X-NORTH.11
N_VN [power]: C139.1 PWR-NORTH.4 X-NORTH.49 X-NORTH.55 X-NORTH.61 X-NORTH.67 X-NORTH.79 X-NORTH.85 X-NORTH.91 X-NORTH.97
N_VN_CV: U11.8 X-NORTH.4
N_VN_OV: U8.50 X-NORTH.3
N_VN_RS: X-NORTH.73
N_VN_UV: U8.60 X-NORTH.9
N_VW [power]: C138.1 PWR-NORTH.6 X-NORTH.13 X-NORTH.19 X-NORTH.31 X-NORTH.37
N_VW_CV: U11.9 X-NORTH.2
N_VW_OV: U8.49 X-NORTH.1
N_VW_RS: X-NORTH.25
N_VW_UV: U8.59 X-NORTH.7
RX1: SER1.3 U1.32
RX1B: U1.5
RX2: SER2.3 U2.32
RX2B: U2.5
RX3: SER3.3 U3.32
RX3B: U3.5
RX4: SER4.3 U4.32
RX4B: U4.5
RX5: SER5.3 U5.32
RX5B: U5.5
RX6: SER6.3 U6.32
RX6B: U6.5
RX7: SER7.3 U7.32
RX7B: U7.5
RX8: SER8.3 U8.32
RX8B: U8.5
S00_N [analog]: U2.24 X-SOUTH.16
S00_P [analog]: U2.27 X-SOUTH.14
S01_N [analog]: U5.54 X-SOUTH.17
S01_P [analog]: U5.53 X-SOUTH.15
S02_N [analog]: U2.22 X-SOUTH.22
S02_P [analog]: U2.23 X-SOUTH.20
S03_N [analog]: U5.58 X-SOUTH.23
S03_P [analog]: U5.55 X-SOUTH.21
S04_N [analog]: U2.17 X-SOUTH.28
S04_P [analog]: U2.21 X-SOUTH.26
S05_N [analog]: U5.64 X-SOUTH.29
S05_P [analog]: U5.48 X-SOUTH.27
S06_N [analog]: U2.44 X-SOUTH.34
S06_P [analog]: U2.43 X-SOUTH.32
S07_N [analog]: U5.46 X-SOUTH.35
S07_P [analog]: U5.47 X-SOUTH.33
S08_N [analog]: U2.46 X-SOUTH.40
S08_P [analog]: U2.45 X-SOUTH.38
S09_N [analog]: U5.44 X-SOUTH.41
S09_P [analog]: U5.45 X-SOUTH.39
S10_N [analog]: U2.15 X-SOUTH.46
S10_P [analog]: U2.16 X-SOUTH.44
S11_N [analog]: U5.2 X-SOUTH.47
S11_P [analog]: U5.1 X-SOUTH.45
S12_N [analog]: U2.13 X-SOUTH.52
S12_P [analog]: U2.14 X-SOUTH.50
S13_N [analog]: U5.13 X-SOUTH.53
S13_P [analog]: U5.12 X-SOUTH.51
S14_N [analog]: U2.2 X-SOUTH.58
S14_P [analog]: U2.12 X-SOUTH.56
S15_N [analog]: U5.15 X-SOUTH.59
S15_P [analog]: U5.14 X-SOUTH.57
S16_N [analog]: U2.64 X-SOUTH.64
S16_P [analog]: U2.1 X-SOUTH.62
S17_N [analog]: U5.17 X-SOUTH.65
S17_P [analog]: U5.16 X-SOUTH.63
S18_N [analog]: U2.48 X-SOUTH.70
S18_P [analog]: U2.47 X-SOUTH.68
S19_N [analog]: U5.27 X-SOUTH.71
S19_P [analog]: U5.43 X-SOUTH.69
S20_N [analog]: U3.43 X-SOUTH.76
S20_P [analog]: U3.27 X-SOUTH.74
S21_N [analog]: U6.47 X-SOUTH.77
S21_P [analog]: U6.48 X-SOUTH.75
S22_N [analog]: U3.16 X-SOUTH.82
S22_P [analog]: U3.17 X-SOUTH.80
S23_N [analog]: U6.1 X-SOUTH.83
S23_P [analog]: U6.64 X-SOUTH.81
S24_N [analog]: U3.14 X-SOUTH.88
S24_P [analog]: U3.15 X-SOUTH.86
S25_N [analog]: U6.12 X-SOUTH.89
S25_P [analog]: U6.2 X-SOUTH.87
S26_N [analog]: U3.12 X-SOUTH.94
S26_P [analog]: U3.13 X-SOUTH.92
S27_N [analog]: U6.14 X-SOUTH.95
S27_P [analog]: U6.13 X-SOUTH.93
S28_N [analog]: U3.1 X-SOUTH.100
S28_P [analog]: U3.2 X-SOUTH.98
S29_N [analog]: U6.16 X-SOUTH.101
S29_P [analog]: U6.15 X-SOUTH.99
S30_N [analog]: U3.45 X-SOUTH.106
S30_P [analog]: U3.44 X-SOUTH.104
S31_N [analog]: U6.45 X-SOUTH.107
S31_P [analog]: U6.46 X-SOUTH.105
S32_N [analog]: U3.47 X-SOUTH.112
S32_P [analog]: U3.46 X-SOUTH.110
S33_N [analog]: U6.43 X-SOUTH.113
S33_P [analog]: U6.44 X-SOUTH.111
S34_N [analog]: U3.48 X-SOUTH.118
S34_P [analog]: U3.64 X-SOUTH.116
S35_N [analog]: U6.21 X-SOUTH.119
S35_P [analog]: U6.17 X-SOUTH.117
S36_N [analog]: U3.55 X-SOUTH.124
S36_P [analog]: U3.58 X-SOUTH.122
S37_N [analog]: U6.23 X-SOUTH.125
S37_P [analog]: U6.22 X-SOUTH.123
S38_N [analog]: U3.53 X-SOUTH.130
S38_P [analog]: U3.54 X-SOUTH.128
S39_N [analog]: U6.27 X-SOUTH.131
S39_P [analog]: U6.24 X-SOUTH.129
S_CHK_EN: U2.29 X-SOUTH.8
S_CHK_V: C143.1 C144.1 PWRS.2 R23.1 R24.1 U12.1 X-SOUTH.10
S_I2C_EN: U6.28 X-SOUTH.137
S_I2C_V: X-SOUTH.135
S_SCK: U3.50 X-SOUTH.144
S_SCL: R4.2 U6.50 X-SOUTH.143
S_SDA: R3.2 U6.51 X-SOUTH.141
S_SDI: U3.51 X-SOUTH.140
S_SDO: U3.52 X-SOUTH.142
S_SPI_EN: U3.49 X-SOUTH.136
S_SPI_V: X-SOUTH.134
S_VE [power]: C134.1 PWR-SOUTH.6 X-SOUTH.13 X-SOUTH.19 X-SOUTH.31 X-SOUTH.37
S_VE_CV: U12.9 X-SOUTH.2
S_VE_OV: U5.49 X-SOUTH.1
S_VE_RS: X-SOUTH.25
S_VE_UV: U5.59 X-SOUTH.7
S_VS [power]: C135.1 PWR-SOUTH.4 X-SOUTH.49 X-SOUTH.55 X-SOUTH.61 X-SOUTH.67 X-SOUTH.79 X-SOUTH.85 X-SOUTH.91 X-SOUTH.97
S_VS_CV: U12.8 X-SOUTH.4
S_VS_OV: U5.50 X-SOUTH.3
S_VS_RS: X-SOUTH.73
S_VS_UV: U5.60 X-SOUTH.9
S_VW [power]: C136.1 PWR-SOUTH.2 X-SOUTH.109 X-SOUTH.115 X-SOUTH.127 X-SOUTH.133
S_VW_CV: U12.7 X-SOUTH.6
S_VW_OV: U5.51 X-SOUTH.5
S_VW_RS: X-SOUTH.121
S_VW_UV: U5.61 X-SOUTH.11
SCK2B: SPI-EAST.3 U2.50
SCK4B: SPI-WEST.3 U4.50
SCL_N: R21.2 U8.63 U11.2
SCL_S: R23.2 U5.63 U12.2
SDA_N: R22.2 U8.62 U11.3
SDA_S: R24.2 U5.62 U12.3
SDI2B: SPI-EAST.4 U2.51
SDI4B: SPI-WEST.4 U4.51
SDO2B: SPI-EAST.5 U2.52
SDO4B: SPI-WEST.5 U4.52
SDO6B: U6.52
SDO7B: U7.52
SS2B: SPI-EAST.2 U2.49
SS4B: SPI-WEST.2 U4.49
SS6B: U6.49
SS7B: U7.49
TX1: SER1.2 U1.31
TX1B: U1.4
TX2: SER2.2 U2.31
TX2B: U2.4
TX3: SER3.2 U3.31
TX3B: U3.4
TX4: SER4.2 U4.31
TX4B: U4.4
TX5: SER5.2 U5.31
TX5B: U5.4
TX6: SER6.2 U6.31
TX6B: U6.4
TX7: SER7.2 U7.31
TX7B: U7.4
TX8: SER8.2 U8.31
TX8B: U8.4
VCC [power]: C2.1 C3.1 C4.1 C5.1 C7.1 C8.1 C9.1 C10.1 C13.1 C14.1 C15.1 C16.1 C18.1 C19.1 C20.1 C21.1 C24.1 C25.1 C26.1 C27.1 C29.1 C30.1 C31.1 C32.1 C35.1 C36.1 C37.1 C38.1 C40.1 C41.1 C42.1 C43.1 C46.1 C47.1 C48.1 C49.1 C51.1 C52.1 C53.1 C54.1 C57.1 C58.1 C59.1 C60.1 C62.1 C63.1 C64.1 C65.1 C68.1 C69.1 C70.1 C71.1 C73.1 C74.1 C75.1 C76.1 C79.1 C80.1 C81.1 C82.1 C84.1 C85.1 C86.1 C87.1 C89.1 C90.1 C91.1 C92.1 C93.1 C94.1 C95.1 C96.1 C97.1 C98.1 C99.1 C100.1 C133.1 C137.1 L1.1 L2.1 L3.1 L4.1 L5.1 L6.1 L7.1 L8.1 R1.1 R2.1 R3.1 R4.1 R5.1 R6.1 R7.1 R8.1 R9.1 R10.1 R11.1 R12.1 R13.1 R14.1 R15.1 R16.1 R17.1 R18.1 R19.1 R20.1 SPI-EAST.6 SPI-WEST.6 SUP-N.2 SUP-S.2 U1.10 U1.26 U1.38 U1.57 U2.10 U2.26 U2.38 U2.57 U3.10 U3.26 U3.38 U3.57 U4.10 U4.26 U4.38 U4.57 U5.10 U5.26 U5.38 U5.57 U6.10 U6.26 U6.38 U6.57 U7.10 U7.26 U7.38 U7.57 U8.10 U8.26 U8.38 U8.57 U9.2 U9.5 U9.10 U9.14 U10.1 U10.4
W_SCK: U3.34 U4.34 U6.34 U8.34
W_SD_36: U3.36 U6.35
W_SD_43: U3.35 U4.36
W_SD_68: U6.36 U8.35
W_SD_84: U4.35 U8.36

## Tracks (layer width: path | path; a pad name or v marks a point on that pad's centre or on a via)
!E_SS  (via drill 0.25 pad 0.25)
  Top 0.152: U7.11 41.58,89.11 43.08,87.61 45.58,87.61 46.58,86.61 U7.33 v52.08,86.61 | 36.71,62.61 U1.11 41.58,62.61 43.08,61.11 45.58,61.11 46.58,60.11 U1.33 v52.08,60.11 | U2.11 41.58,44.11 43.08,42.61 45.58,42.61 46.58,41.61 U2.33 v52.08,41.61 | U5.11 41.58,17.61 43.08,16.11 45.58,16.11 46.58,15.11 U5.33 v50.83,15.11
  Bottom 0.152: v50.83,15.11 51.58,15.11 52.08,15.61 52.08,27.11 50.58,28.61 50.58,31.11 52.08,32.61 v52.08,41.61 v52.08,60.11 52.08,76.61 50.58,78.11 50.58,80.61 52.08,82.11 v52.08,86.61
!LDAC_N  (via drill 0.25)
  Top 0.152: U8.52 v12.57,83.36
  Bottom 0.152: v12.57,83.36 11.82,82.61 11.82,81.36 12.57,80.61 U11.4
!LDAC_S  (via drill 0.25)
  Top 0.152: U5.52 v44.58,25.86
  Bottom 0.152: v44.58,25.86 45.33,26.61 45.33,27.86 44.58,28.61 U12.4
!MCLR1!  (via drill 0.25 pad 0.25)
  Top 0.152: U1.7 37.83,64.61 38.08,64.36 v38.08,64.11 | v43.08,62.61 45.08,64.61 v46.58,64.61 | v49.33,65.36 50.58,66.61 50.58,73.61 52.58,75.61 ICSP1.4
  Bottom 0.152: R12.2 37.88,63.91 v38.08,64.11 39.58,62.61 v43.08,62.61 | v46.58,64.61 49.08,64.61 49.33,64.86 v49.33,65.36
!MCLR2!  (via drill 0.25 pad 0.25)
  Top 0.152: U2.7 37.83,46.11 38.08,45.86 v38.08,45.61 | v43.08,44.11 45.08,46.11 v46.58,46.11 | v49.33,46.86 52.33,46.86 52.58,46.61 ICSP2.4
  Bottom 0.152: R11.2 37.88,45.41 v38.08,45.61 39.58,44.11 v43.08,44.11 | v46.58,46.11 49.08,46.11 49.33,46.36 v49.33,46.86
!MCLR3!  (via drill 0.25 pad 0.25)
  Top 0.152: U3.7 19.32,44.61 19.07,44.86 v19.07,45.11 | v14.07,46.61 12.07,44.61 v10.57,44.61 | v7.82,43.86 6.57,42.61 6.57,35.61 4.57,33.61 ICSP3.4
  Bottom 0.152: R10.2 19.27,45.31 v19.07,45.11 17.57,46.61 v14.07,46.61 | v10.57,44.61 8.07,44.61 7.82,44.36 v7.82,43.86
!MCLR4!  (via drill 0.25 pad 0.25)
  Top 0.152: U4.7 19.32,63.11 19.07,63.36 v19.07,63.61 | v14.07,65.11 12.07,63.11 v10.57,63.11 | v7.82,62.36 4.82,62.36 4.57,62.61 ICSP4.4
  Bottom 0.152: R9.2 19.27,63.81 v19.07,63.61 17.57,65.11 v14.07,65.11 | v10.57,63.11 8.07,63.11 7.82,62.86 v7.82,62.36
!MCLR5!  (via drill 0.25 pad 0.25)
  Top 0.152: U5.7 37.83,19.61 38.08,19.36 v38.08,19.11 | v43.08,17.61 45.08,19.61 v46.58,19.61 | v49.33,20.36 50.33,20.36 53.08,17.61 ICSP5.4
  Bottom 0.152: R8.2 37.88,18.91 v38.08,19.11 39.58,17.61 v43.08,17.61 | v46.58,19.61 49.08,19.61 49.33,19.86 v49.33,20.36
!MCLR6!  (via drill 0.25 pad 0.25)
  Top 0.152: U6.7 19.32,18.11 19.07,18.36 v19.07,18.61 | v14.07,20.11 12.07,18.11 v10.57,18.11 | v7.32,15.36 6.07,14.11 6.07,13.61 4.07,11.61 ICSP6.4
  Bottom 0.152: R7.2 19.27,18.81 v19.07,18.61 17.57,20.11 v14.07,20.11 | v10.57,18.11 8.07,18.11 7.32,17.36 v7.32,15.36
!MCLR7!  (via drill 0.25 pad 0.25)
  Top 0.152: U7.7 37.83,91.11 38.08,90.86 v38.08,90.61 | v43.08,89.11 45.08,91.11 v46.58,91.11 | v49.83,93.86 51.08,95.11 51.08,95.61 53.08,97.61 ICSP7.4
  Bottom 0.152: R6.2 37.88,90.41 v38.08,90.61 39.58,89.11 v43.08,89.11 | v46.58,91.11 49.08,91.11 49.83,91.86 v49.83,93.86
!MCLR8!  (via drill 0.25 pad 0.25)
  Top 0.152: U8.7 19.32,89.61 19.07,89.86 v19.07,90.11 | v14.07,91.61 12.07,89.61 v10.57,89.61 | v7.82,88.86 6.82,88.86 4.07,91.61 ICSP8.4
  Bottom 0.152: R5.2 19.27,90.31 v19.07,90.11 17.57,91.61 v14.07,91.61 | v10.57,89.61 8.07,89.61 7.82,89.36 v7.82,88.86
!W_SS  (via drill 0.25 pad 0.25)
  Top 0.152: U6.11 15.57,20.11 14.07,21.61 11.57,21.61 10.57,22.61 U6.33 v5.07,22.61 | U3.11 15.57,46.61 14.07,48.11 11.57,48.11 10.57,49.11 U3.33 v5.07,49.11 | U4.11 15.57,65.11 14.07,66.61 12.07,66.61 11.07,67.61 U4.33 v5.07,67.61 | U8.11 15.57,91.61 14.07,93.11 11.57,93.11 10.57,94.11 U8.33 v6.32,94.11
  Bottom 0.152: v6.32,94.11 5.57,94.11 5.07,93.61 5.07,82.11 6.57,80.61 6.57,78.11 5.07,76.61 v5.07,67.61 v5.07,49.11 5.07,32.61 6.57,31.11 6.57,28.61 5.07,27.11 v5.07,22.61
AVCC1  (via drill 0.25 pad 0.25)
  Top 0.203: U1.19 39.58,57.11 39.83,56.86 v40.08,56.86
  Bottom 0.203: C6.1 39.58,57.11 39.83,56.86 v40.08,56.86 40.12,56.86 40.38,57.11 | C11.1 40.38,57.11 | L8.2 41.17,57.36 40.92,57.11 40.38,57.11
AVCC2  (via drill 0.25 pad 0.25)
  Top 0.203: U2.19 39.58,38.61 39.83,38.36 v40.08,38.36
  Bottom 0.203: C17.1 39.58,38.61 39.83,38.36 v40.08,38.36 40.12,38.36 | C22.1 40.38,38.61 40.12,38.36 | L7.2 41.17,38.61 40.92,38.36 40.12,38.36
AVCC3  (via drill 0.25 pad 0.25)
  Top 0.203: v17.07,52.36 17.32,52.36 17.57,52.11 U3.19
  Bottom 0.203: v17.07,52.36 17.32,52.36 17.57,52.11 C28.1 | L6.2 15.97,52.11 16.23,52.36 v17.07,52.36 | C33.1 16.77,52.11 17.02,52.36 v17.07,52.36
AVCC4  (via drill 0.25 pad 0.25)
  Top 0.203: U4.19 17.57,70.61 17.32,70.86 v17.07,70.86
  Bottom 0.203: L5.2 15.97,70.36 16.23,70.61 16.77,70.61 | C44.1 16.77,70.61 | 16.77,70.61 17.02,70.86 v17.07,70.86 17.32,70.86 17.57,70.61 C39.1
AVCC5  (via drill 0.25 pad 0.25)
  Top 0.203: U5.19 39.58,12.11 39.83,11.86 v40.08,11.86
  Bottom 0.203: 40.38,12.16 C55.1 40.38,12.11 | 40.38,12.11 40.12,11.86 v40.08,11.86 39.83,11.86 39.58,12.11 C50.1 | L4.2 41.17,12.36 40.92,12.11 40.38,12.11
AVCC6  (via drill 0.25 pad 0.25)
  Top 0.203: v17.07,25.86 17.32,25.86 17.57,25.61 U6.19
  Bottom 0.203: C61.1 17.57,25.61 17.32,25.86 v17.07,25.86 17.02,25.86 16.77,25.61 | C66.1 16.77,25.61 | L1.2 15.97,25.36 16.23,25.61 16.77,25.61
AVCC7  (via drill 0.25 pad 0.25)
  Top 0.203: U7.19 39.58,83.61 39.83,83.36 v40.08,83.36
  Bottom 0.203: C72.1 39.58,83.61 39.83,83.36 v40.08,83.36 40.12,83.36 40.38,83.61 | C77.1 40.38,83.61 | L2.2 41.17,83.86 40.92,83.61 40.38,83.61
AVCC8  (via drill 0.25 pad 0.25)
  Top 0.203: U8.19 17.57,97.11 17.32,97.36 v17.07,97.36
  Bottom 0.203: L3.2 15.97,96.86 16.23,97.11 16.77,97.11 | C88.1 16.77,97.11 | 16.77,97.11 17.02,97.36 v17.07,97.36 17.32,97.36 17.57,97.11 C83.1
CAP1A
  Top 0.152: 42.08,58.24 U1.24 42.08,56.11 42.27,55.91 C101.1
CAP1B
  Top 0.152: 41.58,58.23 U1.23 41.58,55.61 42.08,55.11 C102.1
CAP1C
  Top 0.152: 41.08,58.24 U1.22 41.08,56.36 40.58,55.86 38.08,55.86 37.58,55.36 C103.1
CAP1D
  Top 0.152: 40.58,58.24 U1.21 40.58,56.61 40.33,56.36 37.83,56.36 37.58,56.61 C104.1
CAP2A
  Top 0.152: U2.58 41.58,52.61 41.38,52.81 C105.1
CAP2B
  Top 0.152: 43.08,52.86 42.58,53.36 41.58,53.36 41.33,53.61 C106.1
  Top 0.203: U2.55 43.08,52.86
CAP2C
  Top 0.152: U2.54 43.58,53.51 43.23,53.86 41.83,53.86 41.33,54.36 39.33,54.36 37.58,52.61 C107.1
CAP2D
  Top 0.152: U2.53 44.08,53.86 43.58,54.36 42.08,54.36 41.58,54.86 38.58,54.86 37.58,53.86 C108.1
CAP3A
  Top 0.152: 15.07,50.98 U3.24 15.07,53.06 14.82,53.31 C109.1
CAP3B
  Top 0.152: 15.57,50.98 U3.23 15.57,53.61 15.07,54.11 C110.1
CAP3C
  Top 0.152: 16.07,50.98 U3.22 16.07,53.36 16.57,53.86 C111.1
CAP3D
  Top 0.152: 16.57,50.98 U3.21 16.57,52.86 16.82,53.11 19.07,53.11 19.57,52.61 C112.1
CAP4A
  Top 0.152: 15.57,58.23 U4.58 15.57,56.61 15.77,56.41 C113.1
CAP4B
  Top 0.152: U4.55 14.07,56.11 14.32,55.86 15.62,55.86 15.88,55.61 C114.1
CAP4C
  Top 0.152: U4.54 13.57,55.71 13.92,55.36 15.47,55.36 15.97,54.86 17.82,54.86 19.57,56.61 C115.1
CAP4D
  Top 0.152: 13.07,58.24 U4.53 13.07,55.36 13.57,54.86 15.12,54.86 15.62,54.36 18.07,54.36 19.07,55.36 C116.1
CAP5A
  Top 0.152: U5.24 42.08,11.61 42.42,11.26 C117.1
CAP5B
  Top 0.152: U5.23 C118.1
CAP5C
  Top 0.152: U5.22 41.08,11.11 40.42,10.46 C119.1
CAP5D
  Top 0.152: U5.21 40.58,11.36 40.08,10.86 39.42,10.86 39.17,10.61 C120.1
CAP6A
  Top 0.152: 15.57,13.23 U6.58 C121.1
CAP6B
  Top 0.152: 14.07,13.23 U6.55 14.07,11.86 14.72,11.21 C122.1
CAP6C
  Top 0.152: 13.57,13.24 U6.54 C123.1
CAP6D
  Top 0.152: 13.07,13.24 U6.53 13.07,11.11 12.32,10.36 C124.1
CAP7A
  Top 0.152: 41.58,95.98 U7.58 C125.1
CAP7B
  Top 0.152: 43.08,95.98 U7.55 43.08,97.36 42.42,98.01 C126.1
CAP7C
  Top 0.152: 43.58,95.98 U7.54 C127.1
CAP7D
  Top 0.152: 44.08,95.98 U7.53 44.08,98.11 44.83,98.86 C128.1
CAP8A
  Top 0.152: U8.24 15.07,97.61 14.72,97.96 C129.1
CAP8B
  Top 0.152: U8.23 C130.1
CAP8C
  Top 0.152: U8.22 16.07,98.11 16.73,98.76 C131.1
CAP8D
  Top 0.152: U8.21 16.57,97.86 17.07,98.36 17.73,98.36 17.98,98.61 C132.1
CLKIN1  (via drill 0.25 pad 0.25)
  Top 0.152: U1.39 49.58,63.11 49.83,63.36 v49.83,63.86 | U9.8 32.8,56.88 v33.08,56.61
  Route2 0.152: v49.83,63.86 49.83,62.36 49.08,61.61 49.08,55.86 48.58,55.36 34.33,55.36 v33.08,56.61
CLKIN2  (via drill 0.25 pad 0.25)
  Top 0.152: U2.39 49.58,44.61 49.83,44.86 v49.83,45.36 | U9.16 29.85,52.34 v30.57,51.61
  Route2 0.152: v49.83,45.36 50.58,46.11 50.58,53.11 49.83,53.86 33.83,53.86 31.57,51.61 v30.57,51.61
CLKIN3  (via drill 0.25 pad 0.25)
  Top 0.152: U3.39 7.57,46.11 7.32,45.86 v7.32,45.36 | U9.15 24.2,52.98 v24.07,53.11
  Route2 0.152: v7.32,45.36 7.32,46.86 8.07,47.61 8.07,53.36 8.57,53.86 23.32,53.86 v24.07,53.11
CLKIN4  (via drill 0.25 pad 0.25)
  Top 0.152: U4.39 7.57,64.61 7.32,64.36 v7.32,63.86 | U9.9 24.35,56.88 v24.07,56.61
  Route2 0.152: v7.32,63.86 6.57,63.11 6.57,56.11 7.32,55.36 22.82,55.36 v24.07,56.61
CLKIN5  (via drill 0.25 pad 0.25)
  Top 0.152: U5.39 49.08,18.11 49.33,18.36 v49.33,18.86 | U9.3 32.6,53.63 v33.08,54.11
  Route2 0.152: v49.33,18.86 50.58,18.86 51.08,19.36 51.08,26.61 49.58,28.11 49.58,31.61 51.08,33.11 51.08,53.61 50.33,54.36 33.33,54.36 v33.08,54.11
CLKIN6  (via drill 0.25 pad 0.25)
  Top 0.152: U6.39 7.57,19.61 v7.32,19.36 | U9.13 24.15,54.28 v24.07,54.36
  Route2 0.152: v7.32,19.36 7.07,19.61 7.07,20.86 7.57,21.36 7.57,31.61 6.07,33.11 6.07,53.61 6.82,54.36 v24.07,54.36
CLKIN7  (via drill 0.25 pad 0.25)
  Top 0.152: U7.39 49.58,89.61 v49.83,89.86 | v33.08,55.36 32.85,55.59 U9.6
  Route2 0.152: v49.83,89.86 50.08,89.61 50.08,88.36 49.58,87.86 49.58,77.61 51.08,76.11 51.08,55.61 50.33,54.86 33.58,54.86 v33.08,55.36
CLKIN8  (via drill 0.25 pad 0.25)
  Top 0.152: U8.39 8.07,91.11 7.82,90.86 v7.82,90.36 | U9.11 24.3,55.59 v24.07,55.36
  Route2 0.152: v7.82,90.36 6.57,90.36 6.07,89.86 6.07,82.61 7.57,81.11 7.57,77.61 6.07,76.11 6.07,55.61 6.82,54.86 23.57,54.86 v24.07,55.36
E_SCK  (via drill 0.25 pad 0.25)
  Top 0.152: U5.34 v50.33,15.61 | U2.34 v51.58,42.11 | U7.34 v51.58,87.11 | U1.34 v51.58,60.61
  Bottom 0.152: v50.33,15.61 51.08,15.61 51.58,16.11 51.58,26.86 50.08,28.36 50.08,31.36 51.58,32.86 v51.58,42.11 v51.58,60.61 51.58,76.36 50.08,77.86 50.08,80.86 51.58,82.36 v51.58,87.11
E_SD_17  (via drill 0.25 pad 0.25)
  Top 0.152: U1.36 v49.83,61.61 | U7.35 v50.58,87.61
  Bottom 0.152: v49.83,61.61 50.33,61.61 50.58,61.86 50.58,75.86 49.08,77.36 49.08,81.36 50.58,82.86 v50.58,87.61
E_SD_21  (via drill 0.25 pad 0.25)
  Top 0.152: U2.36 v50.08,43.11 | U1.35 v50.33,61.11
  Bottom 0.152: v50.33,61.11 50.58,60.86 50.58,43.36 50.33,43.11 v50.08,43.11
E_SD_52  (via drill 0.25 pad 0.25)
  Top 0.152: U5.36 v49.33,16.61 | U2.35 v50.58,42.61
  Bottom 0.152: v49.33,16.61 50.08,16.61 50.58,17.11 50.58,26.36 49.08,27.86 49.08,31.86 50.58,33.36 v50.58,42.61
E_SD_75  (via drill 0.25 pad 0.25)
  Top 0.152: U5.35 v49.83,16.11 | U7.36 v51.08,88.11
  Bottom 0.152: v49.83,16.11 50.58,16.11 51.08,16.61 51.08,26.61 49.58,28.11 49.58,31.61 51.08,33.11 51.08,76.11 49.58,77.61 49.58,81.11 51.08,82.61 v51.08,88.11
GND  (via drill 0.25 pad 0.25, 0.8 pad 0.25)  (2 unrouted)
  Top 0.203: U8.56 14.57,85.86 | U7.25 42.58,85.86 | U1.56 42.58,68.36 | U4.25 14.57,68.36 | U3.56 14.57,40.86 | U2.20 40.08,40.86 | U2.25 42.58,40.86 | U6.25 14.57,23.36 | U6.20 17.07,23.36 | U4.20 17.07,68.36 | U7.20 40.08,85.86 | U5.56 42.58,23.36 | U3.25 14.57,49.91 | U3.20 17.07,49.91 | U4.56 14.57,59.36 | U7.56 42.58,94.86 | U7.63 39.08,94.86 | U8.20 17.07,94.86 | U8.25 14.57,94.86 | U2.56 42.58,49.86 | U6.56 14.57,14.36 | U5.20 40.08,14.36 | U5.25 42.58,14.36 | U1.20 40.08,59.36 | U1.25 42.58,59.36
  Top 0.254: v20.82,28.11 X-SOUTH.103 20.82,30.61 | v35.83,28.11 X-SOUTH.43 35.83,30.61 | v21.32,81.11 X-NORTH.43 21.32,78.61 | v36.33,81.11 X-NORTH.103 36.33,78.61 | v45.33,81.11 X-NORTH.139 45.33,78.61 | v11.82,28.11 X-SOUTH.139 11.82,30.61 | v12.32,36.61 X-SOUTH.138 12.32,33.86 | v13.82,36.61 X-SOUTH.132 13.82,33.86 | v15.32,36.61 X-SOUTH.126 15.32,33.86 | v16.82,36.61 X-SOUTH.120 16.82,33.86 | v18.32,36.61 X-SOUTH.114 18.32,33.86 | v19.82,36.61 X-SOUTH.108 19.82,33.86 | v21.32,36.61 X-SOUTH.102 21.32,33.86 | v22.82,36.61 X-SOUTH.96 22.82,33.86 | v24.32,36.61 X-SOUTH.90 24.32,33.86 | v25.82,36.61 X-SOUTH.84 25.82,33.86 | v27.32,36.61 X-SOUTH.78 27.32,33.86 | v28.82,36.61 X-SOUTH.72 28.82,33.86 | v30.32,36.61 X-SOUTH.66 30.32,33.86 | v31.82,36.61 X-SOUTH.60 31.82,33.86 | v33.33,36.61 X-SOUTH.54 33.33,33.86 | v34.83,36.61 X-SOUTH.48 34.83,33.86 | v36.33,36.61 X-SOUTH.42 36.33,33.86 | v37.83,36.61 X-SOUTH.36 37.83,33.86 | v39.33,36.61 X-SOUTH.30 39.33,33.86 | v40.83,36.61 X-SOUTH.24 40.83,33.86 | v42.33,36.61 X-SOUTH.18 42.33,33.86 | v43.83,36.61 X-SOUTH.12 43.83,33.86 | 44.83,75.36 X-NORTH.138 v44.83,72.61 | 43.33,75.36 X-NORTH.132 v43.33,72.61 | 41.83,75.36 X-NORTH.126 v41.83,72.61 | 40.33,75.36 X-NORTH.120 v40.33,72.61 | 38.83,75.36 X-NORTH.114 v38.83,72.61 | 37.33,75.36 X-NORTH.108 v37.33,72.61 | 35.83,75.36 X-NORTH.102 v35.83,72.61 | 34.33,75.36 X-NORTH.96 v34.33,72.61 | 32.83,75.36 X-NORTH.90 v32.83,72.61 | 31.32,75.36 X-NORTH.84 v31.32,72.61 | 29.82,75.36 X-NORTH.78 v29.82,72.61 | 28.32,75.36 X-NORTH.72 v28.32,72.61 | 26.82,75.36 X-NORTH.66 v26.82,72.61 | 25.32,75.36 X-NORTH.60 v25.32,72.61 | 23.82,75.36 X-NORTH.54 v23.82,72.61
  Top 0.254: 22.32,75.36 X-NORTH.48 v22.32,72.61 | 20.82,75.36 X-NORTH.42 v20.82,72.61 | 19.32,75.36 X-NORTH.36 v19.32,72.61 | 17.82,75.36 X-NORTH.30 v17.82,72.61 | 16.32,75.36 X-NORTH.24 v16.32,72.61 | 14.82,75.36 X-NORTH.18 v14.82,72.61 | 13.32,75.36 X-NORTH.12 v13.32,72.61
  other vias: 14.82,63.86 42.33,63.86 14.82,90.36 42.33,90.36 14.82,45.36 42.33,45.36 14.82,18.86 42.33,18.86 21.82,63.36 4.32,34.61 4.32,38.61 4.32,36.61 4.32,63.61 4.32,65.61 4.32,67.61 4.32,72.61 4.32,74.61 0.63,98.61 0.63,96.61 0.63,94.61 0.63,86.61 0.63,82.61 0.63,74.61 0.63,72.61 0.63,70.61 0.63,67.61 0.63,65.61 0.63,63.61 0.63,47.61 0.63,45.61 0.63,43.61 0.63,41.61 0.63,38.61 0.63,36.61 0.63,34.61 0.63,32.61 0.63,10.61 0.63,12.61 0.63,14.61 -3.18,19.86 -3.18,21.36 0.63,22.86 0.63,26.86 56.52,10.61 56.52,12.61 56.52,14.61 56.52,22.61 56.52,26.61 56.52,34.61 56.52,36.61 56.52,39.61 56.52,41.61 56.52,43.61 56.52,45.61 56.52,47.61 56.52,63.61 56.52,65.61 56.52,67.61 56.52,70.61 56.52,72.61 56.52,74.61 56.52,76.61 56.52,98.61 56.52,96.61 56.52,94.61 56.52,86.36 56.52,82.36 10.57,108.59 12.57,108.59 42.58,108.59 46.58,108.59 44.58,108.59 14.57,108.59 0.63,100.61 0.63,92.61 0.63,76.61 0.63,69.61 0.63,61.61 0.63,40.61 0.63,16.61 0.63,8.61 56.52,8.61 56.52,16.61 56.52,32.61 56.52,38.61 56.52,61.61 56.52,68.61 56.52,92.61 56.52,100.61 28.57,108.59 26.04,108.59 23.49,108.59 31.11,108.59 33.66,108.59 36.2,108.59 20.95,108.59 18.32,108.59 38.83,108.59 4.32,70.61 4.32,76.61 4.32,69.61 4.32,61.61 4.32,41.61 4.32,40.61 4.32,32.61 4.32,18.61 4.32,14.61 4.32,12.61 4.32,10.61 4.32,98.61 12.57,104.78 14.57,104.78 42.58,104.78 44.58,104.78 46.58,104.78 10.57,104.78 18.32,104.78 23.49,104.78 28.57,104.78 33.66,104.78 38.83,104.78 52.83,10.61 52.83,32.61 52.83,34.61 52.83,36.61 52.83,38.61 52.83,39.61 52.83,41.61 52.83,43.61 52.83,45.61 52.83,47.61 52.83,67.61 52.83,68.61 52.83,70.61 52.83,72.61 52.83,74.61 52.83,76.61 52.83,90.61 52.83,94.61 52.83,96.61 52.83,98.61 52.83,24.61 52.83,22.61 4.32,86.61 4.32,84.61 52.83,84.61 4.32,96.61 52.83,12.61 46.58,0.63 44.58,0.63 10.57,0.63 12.57,0.63 14.57,0.63 42.58,0.63 28.57,0.63 31.11,0.63 33.66,0.63 26.04,0.63 23.49,0.63 20.95,0.63 36.2,0.63 38.83,0.63 18.32,0.63 46.58,4.45 44.58,4.45 42.58,4.45 18.32,4.45 23.49,4.45 28.57,4.45 33.66,4.45 38.83,4.45 10.57,4.45 12.57,4.45 14.57,4.45 7.32,53.11 49.83,56.11 49.83,53.11 7.32,56.11 10.32,59.36 19.32,59.36 10.32,68.36 19.32,68.36 38.83,68.36 46.83,68.36 46.83,59.36 37.83,59.36 37.83,49.86 46.83,49.86 46.83,40.86 37.83,40.86 19.32,49.86 10.32,49.86 10.32,40.86 19.32,23.36 19.32,14.36 37.83,14.36 46.83,14.36 46.83,23.36 39.83,23.36 10.32,85.86 10.32,94.86 19.32,94.86 37.83,85.86 37.83,94.86 7.82,73.86 9.32,73.86 9.32,79.86 49.33,73.86 47.83,73.86 47.83,79.86 7.82,35.36 9.32,35.36 9.32,29.36 47.83,29.36 47.83,35.36 49.33,35.36 52.83,15.61 4.32,16.61 52.83,92.61 4.32,93.61 56.52,50.61 56.52,52.61 56.52,54.61 56.52,56.61 56.52,58.61 56.52,60.61 52.83,56.61 52.83,54.61 52.83,52.61 52.83,50.61 0.63,50.61 0.63,52.61 0.63,54.61 0.63,56.61 0.63,58.61 0.63,60.61 4.32,60.61 4.32,58.61 4.32,56.61 4.32,54.61 43.33,49.86 37.83,42.86 44.83,40.86 46.83,43.36 10.32,47.36 12.32,49.86 14.32,14.36 10.32,20.86 19.32,21.36 10.32,65.86 14.32,59.36 19.32,66.36 12.32,68.36 10.32,92.36 12.32,94.86 19.32,92.86 43.33,94.86 37.83,87.86 46.83,88.36 18.32,40.86 18.32,59.36 17.32,85.86 18.32,14.36 37.83,16.36 46.83,16.86 44.83,14.36 38.83,49.86 46.83,61.86 37.83,61.36 38.83,94.86 43.33,68.36 44.83,23.36 18.57,56.61 38.58,52.61 12.32,53.11 44.83,56.11 41.58,8.86 42.42,8.86 15.57,100.36 14.72,100.36 42.42,100.36 41.58,100.36 17.98,102.11 16.73,102.11 40.42,7.11 39.17,7.11 23.07,56.61 23.07,52.61 34.08,52.61 34.08,56.61 12.32,7.11 13.57,7.11 43.58,102.11 45.08,102.11 14.72,8.86 15.57,8.86 26.82,23.36 26.82,14.36 26.82,18.86 29.32,23.36 29.32,18.86 29.32,14.36 27.32,94.86 27.32,90.36 27.32,85.86 29.82,85.86 29.82,90.36 29.82,94.86 27.32,68.36 29.82,68.36 29.82,63.86 27.32,63.86 27.32,40.86 29.82,40.86 27.32,45.36 29.82,45.36 27.32,49.86 29.82,49.86 27.32,59.36 29.82,59.36 28.57,45.36 28.57,49.86 28.57,40.86 28.57,59.36 28.57,63.86 28.57,68.36 10.32,51.61 46.83,57.61 7.07,91.11 7.07,89.36 50.08,18.11 50.08,19.86 6.32,17.86 6.32,15.61 50.83,91.36 50.83,93.61 0.63,6.61 0.63,18.61 0.63,20.61 56.52,18.61 56.52,20.61 56.52,6.61 56.52,90.61 56.52,88.61 56.52,102.61 0.63,90.61 0.63,102.61 0.63,88.61 12.32,85.86 0.63,84.61 56.52,24.61 56.52,29.86 0.63,29.86 0.63,79.36 52.83,26.61 4.32,82.61 49.53,6.61 7.62,6.61 7.62,2.54 49.53,2.54 7.62,104.78 52.08,104.78 54.58,104.78 49.53,106.68 7.62,106.68 2.57,104.78 5.07,104.78 0.63,104.78 7.62,108.59 49.53,108.59 49.53,104.78 56.52,104.78 56.52,4.45 49.53,0.63 49.53,4.45 7.62,0.63 7.62,4.45 0.63,4.45 2.57,4.45 5.07,4.45 52.08,4.45 54.58,4.45 46.58,94.86
  pour Top (rank 3): 0,3.81 0,105.41 6.98,105.41 6.98,109.22 50.16,109.22 50.16,105.41 57.15,105.41 57.15,3.81 50.16,3.81 50.16,0 6.98,0 6.98,3.81
  pour Route2 (rank 3): 0,3.81 0,105.41 6.98,105.41 6.98,109.22 50.16,109.22 50.16,105.41 57.15,105.41 57.15,3.81 50.16,3.81 50.16,0 6.98,0 6.98,3.81
  pour Bottom (rank 3): 0,3.81 0,105.41 6.98,105.41 6.98,109.22 50.16,109.22 50.16,105.41 57.15,105.41 57.15,3.81 50.16,3.81 50.16,0 6.98,0 6.98,3.81
  cutout Top: 10.07,75.11 47.08,75.11 47.08,70.11 46.58,69.61 38.08,69.61 38.08,70.61 37.58,71.11 35.58,71.11 35.08,70.61 35.08,68.61 35.58,68.11 36.58,68.11 36.58,66.61 34.58,66.61 34.08,66.11 34.08,63.11 34.58,62.61 36.58,62.61 36.58,59.61 32.58,59.61 33.58,58.61 39.08,58.61 39.08,57.61 32.58,57.61 30.57,59.61 30.57,70.61 30.07,71.11 26.57,71.11 26.07,70.61 26.07,59.61 24.07,57.61 18.07,57.61 18.07,58.61 23.07,58.61 24.07,59.61 20.57,59.61 20.57,61.11 23.57,61.11 24.07,61.61 24.07,64.61 23.57,65.11 20.57,65.11 20.57,68.11 21.07,68.11 21.57,68.61 21.57,70.61 21.07,71.11 19.57,71.11 19.07,70.61 19.07,69.61 10.57,69.61 10.07,70.11
  cutout Top: 47.08,34.11 10.07,34.11 10.07,39.11 10.57,39.61 19.07,39.61 19.07,38.61 19.57,38.11 21.57,38.11 22.07,38.61 22.07,40.61 21.57,41.11 20.57,41.11 20.57,42.61 22.57,42.61 23.07,43.11 23.07,46.11 22.57,46.61 20.57,46.61 20.57,49.61 24.57,49.61 23.57,50.61 18.07,50.61 18.07,51.61 24.57,51.61 26.57,49.61 26.57,38.61 27.07,38.11 30.57,38.11 31.07,38.61 31.07,49.61 33.08,51.61 39.08,51.61 39.08,50.61 34.08,50.61 33.08,49.61 36.58,49.61 36.58,48.11 33.58,48.11 33.08,47.61 33.08,44.61 33.58,44.11 36.58,44.11 36.58,41.11 36.08,41.11 35.58,40.61 35.58,38.61 36.08,38.11 37.58,38.11 38.08,38.61 38.08,39.61 46.58,39.61 47.08,39.11